# Altium PCB RS485_ProMini.PcbDoc
Units mil, origin at the board's own origin, x right, y up, seen from the top; angles counter-clockwise.
Board outline 6000 x 4000 mil, 2 copper layers (Top Layer, Bottom Layer); 6 components, 10 nets, 55 pads, 0 vias.
Unrouted connection lines stored in the file: 18.
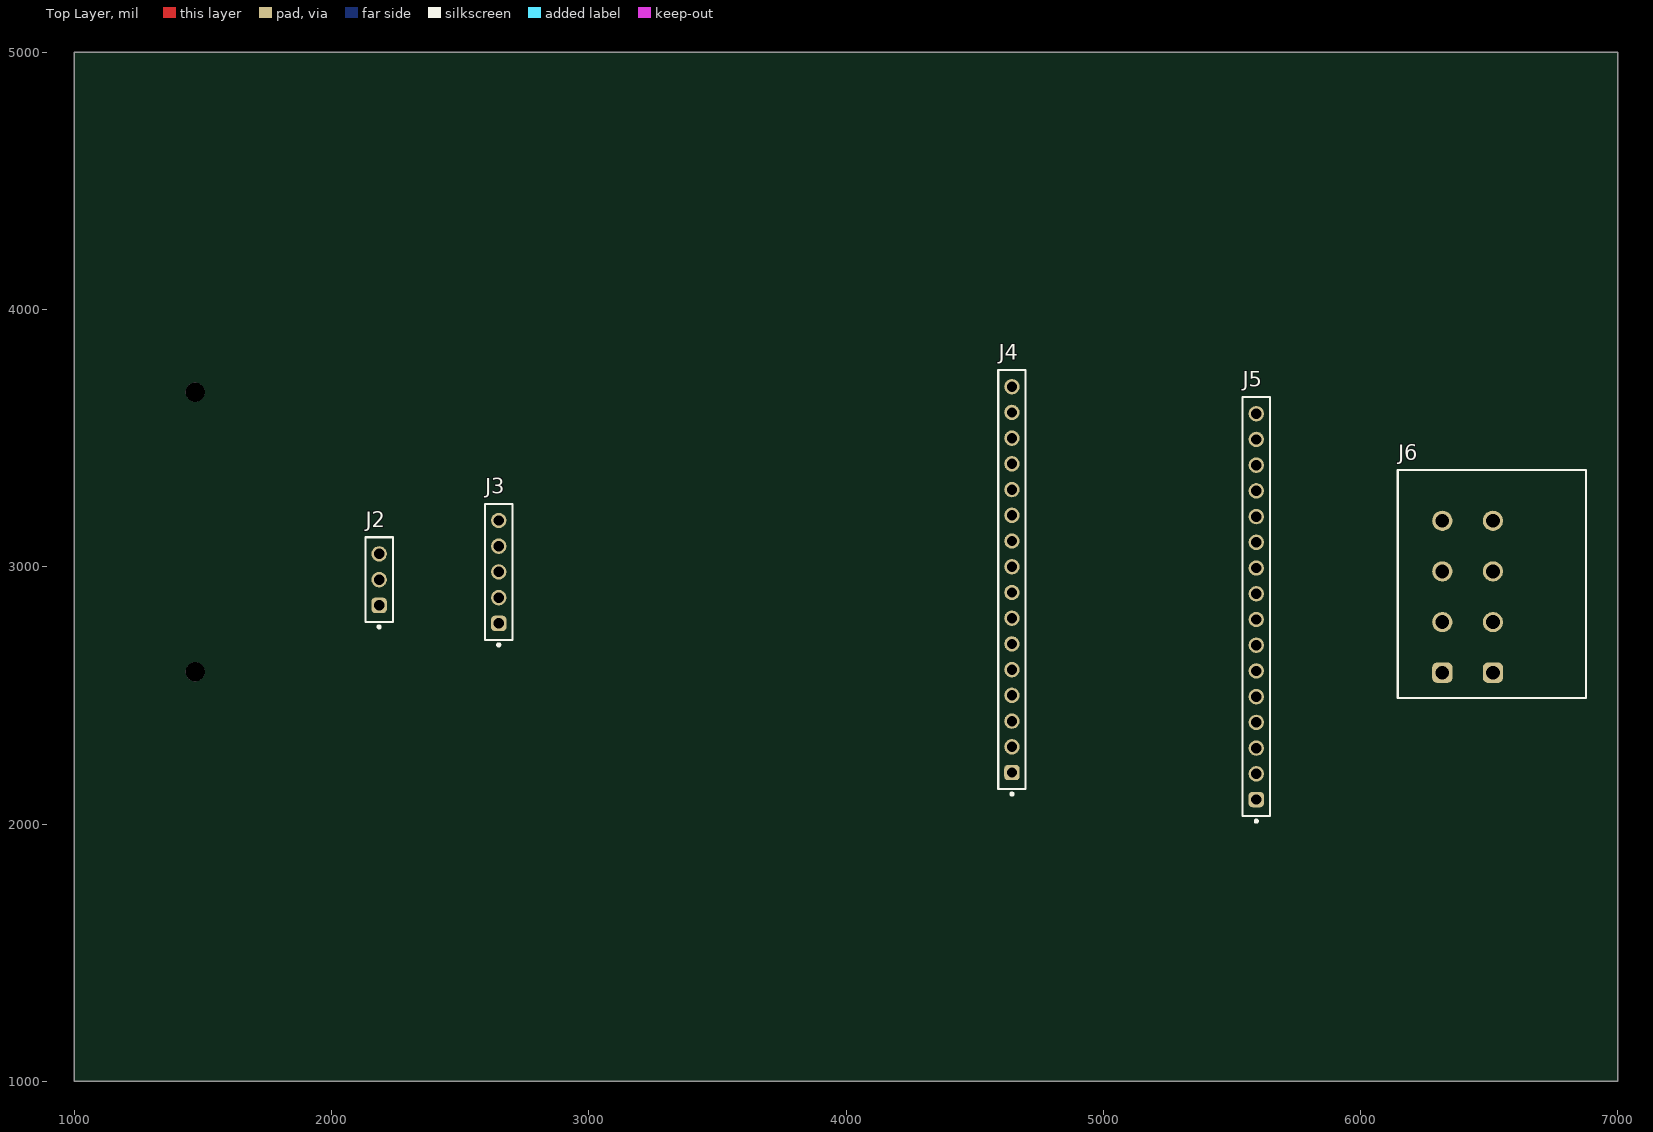
[diagram p0: Top Layer view]
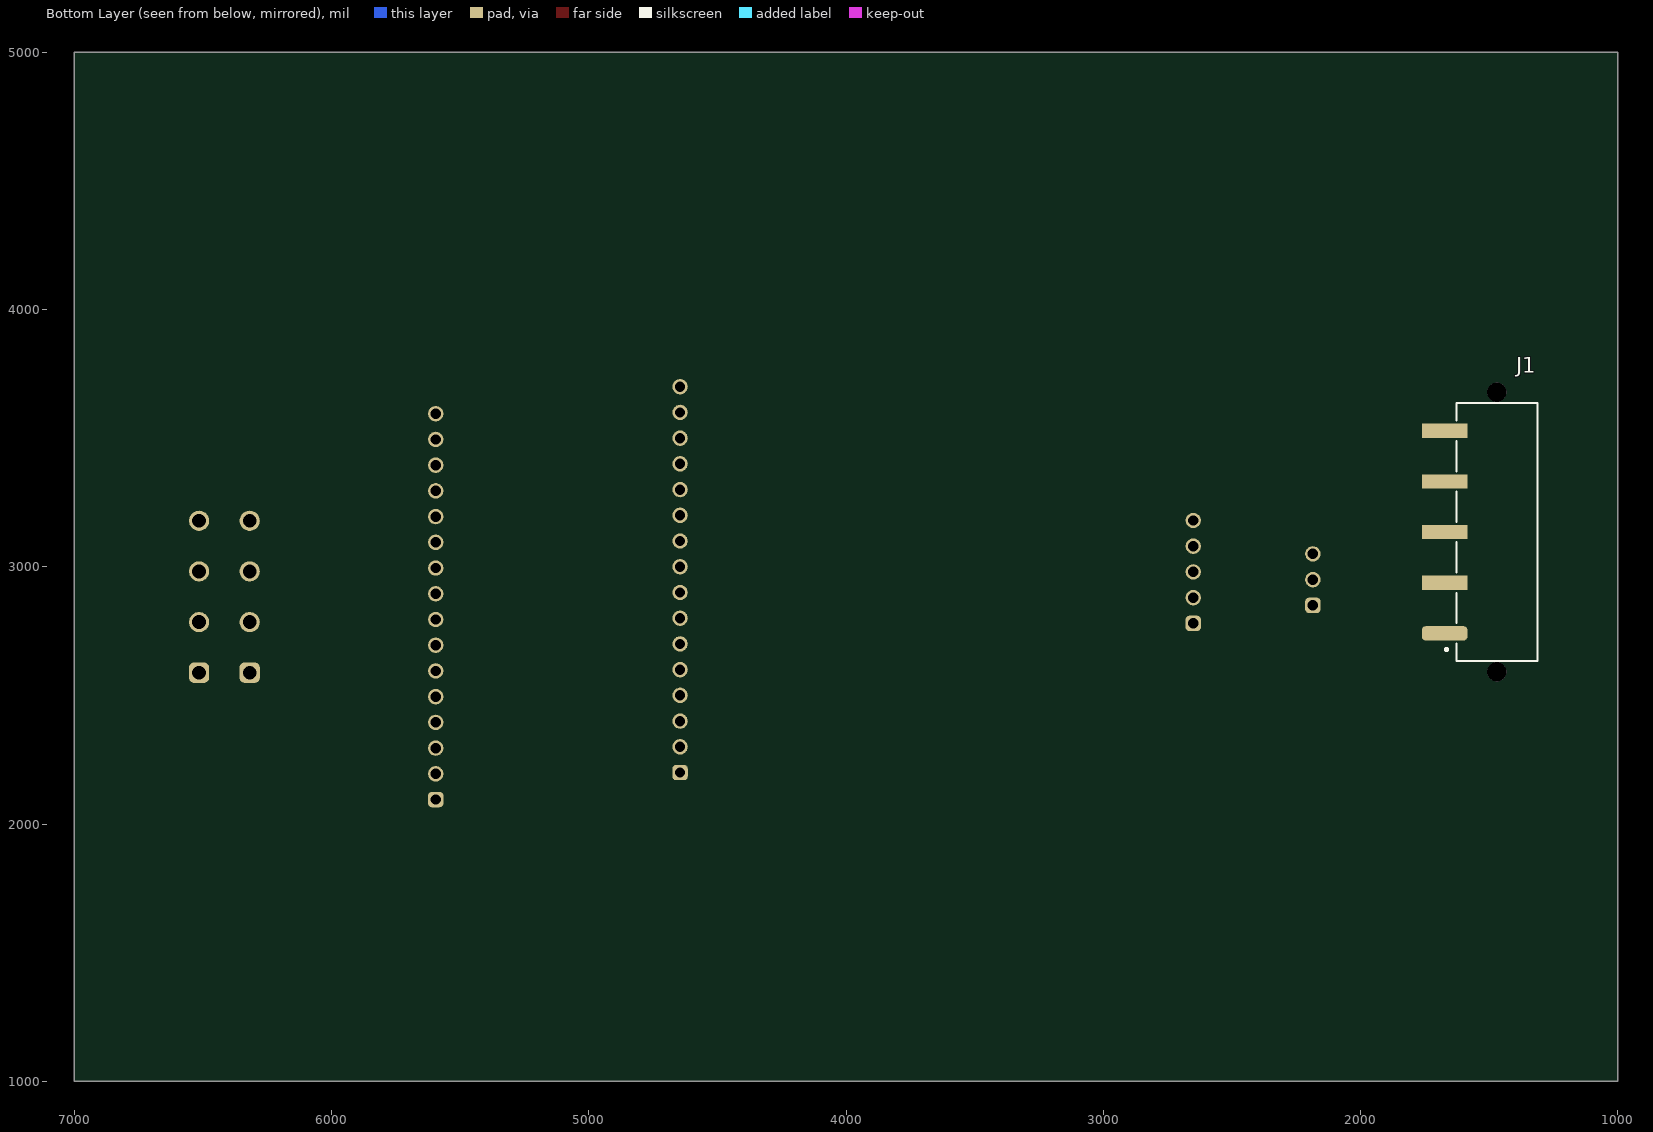
[diagram p1: Bottom Layer view, seen from below]

## Layer stack, top to bottom
Top Solder: solder mask 0.4, Solder Resist, Dk 3.5
Top Layer: signal copper 1.4
Dielectric 1: dielectric 12.6, FR-4, Dk 4.8
Bottom Layer: signal copper 1.4
Bottom Solder: solder mask 0.4, Solder Resist, Dk 3.5

## Board outline
1000,1000 7000,1000 7000,5000 1000,5000

## Design rules (kind name [scope] priority, off if disabled: settings)
Clearance [All] p1: gap=10 ignorepadtopadclearanceinfootprint=FALSE
PolygonConnect [All] p1: connectstyle=Relief reliefconductorwidth=10 reliefentries=4 polygonreliefangle="90 Angle" airgapwidth=10
RoutingVias [All] p1: holewidth=28 width=50 viastyle="Through Hole" minholewidth=28 minwidth=50 maxholewidth=28 maxwidth=50
SolderMaskExpansion [All] p1: expansion=0 istentingtop=FALSE
Width [All] p1: maxlimit=10 minlimit=10 preferedwidth=10
30 further rules are at their usual default settings.

## Classes and differential pairs
component class RS485_promini_connecter: J2 J3 J5 J6

## Components (designator, comment, footprint, x,y, rotation, side; value= is the part's Value field where it differs from the comment)
J1 "691709710305" 691709710305 1470,3135 r90 bottom
J2 "61300311821" 61300311821 2185,2950 r90 top
J3 "61300511821" 61300511821 2650,2980 r90 top
J4 "61301611821" 61301611821 4645,2950 r90 top
J5 "61301611821" 61301611821 5595,2845 r90 top
J6 "691127700004B" 691127700004B 6511.06,2932.64 r90 top

## Footprints (in the part's own frame and the unit in brackets; to place one, negate y for a bottom-side part, rotate by r counter-clockwise, add the part's x,y. Pads: shape width x height; smd on the part's side, far side on the other; paste and mask are expansions set on the pad)
61300311821 [mm] "Socket Header, Pitch 2.54 mm, THT, Vertical, single row, 3p"
  rrect50% 1.52x1.52 hole 1.02: 1(-2.54,0)
  round 1.52 hole 1.02: 2(0,0) 3(2.54,0)
  silkscreen extent -4.79,-1.35 4.19,1.35, body extent -4.06,-1.25 4.06,1.25, height 8.55
61300511821 [mm] "Socket Header, Pitch 2.54 mm, THT, Vertical, single row, 5p"
  rrect50% 1.52x1.52 hole 1.02: 1(-5.08,0)
  round 1.52 hole 1.02: 2(-2.54,0) 3(0,0) 4(2.54,0) 5(5.08,0)
  silkscreen extent -7.33,-1.35 6.73,1.35, body extent -6.6,-1.25 6.6,1.25, height 8.55
61301611821 [mm] "Socket Header, Pitch 2.54 mm, THT, Vertical, single row, 16p"
  rrect50% 1.52x1.52 hole 1.02: 1(-19.05,0)
  round 1.52 hole 1.02: 2(-16.51,0) 3(-13.97,0) 4(-11.43,0) 5(-8.89,0) 6(-6.35,0) 7(-3.81,0) 8(-1.27,0) 9(1.27,0) 10(3.81,0) 11(6.35,0) 12(8.89,0) 13(11.43,0) 14(13.97,0) 15(16.51,0) 16(19.05,0)
  silkscreen extent -21.3,-1.35 20.7,1.35, body extent -20.57,-1.25 20.57,1.25, height 8.55
691127700004B [mm] "5,00 mm - PCB Vertical - 04p"
  rrect50% 2x2 hole 1.35: 1(-8.75,-0.1) 1(-8.75,4.9)
  round 2 hole 1.35: 2(-3.75,-0.1) 2(-3.75,4.9) 3(1.25,4.9) 3(1.25,-0.1) 4(6.25,-0.1) 4(6.25,4.9)
  silkscreen extent -11.25,-9.3 11.25,9.3, body extent -11.25,-9.3 11.25,9.3, height 19.6
691709710305 [mm] "Horizontal Entry SMT with Pressure Clamp, pitch 5mm, 05p"
  rrect50% 1.4x4.5 smd: 1(-10,5.15)
  rect 1.4x4.5 smd: 2(-5,5.15) 3(0,5.15) 4(5,5.15) 5(10,5.15)
  round 1.9 hole 1.9 unplated: M1(-13.8,0) M2(13.8,0)
  silkscreen extent -12.75,-4 12.75,5.1, body extent -14.5,-4 14.5,7, height 9.95

## Part data
J1: library part CMP-1502-03338-3, "Terminal Block, 5.0MM, Rising Cage Clamp, Horizontal, SMT, 30-14 AWG, 5 Pins", Color=Black, Current=6A, Flammability Rating="UL94 V-0", Max Operating Temperature=130°C, Min Operating Temperature=-40°C, Voltage=300V, Connector Type=Screw, Contact Plating=Tin, Current Rating=6A, Housing Material=Nylon, Lead Pitch=5mm, Length=25mm, Mount="Surface Mount", Number of Contacts=5, Number of Levels=1, Number of Pins=5, Number of Positions=5, Number of Positions Per Level=5, Packaging="Cut Tape (CT)", Pitch=5mm, Plating=Steel, RoHS=Compliant, Termination=Screw, Voltage Rating=300V, Wire Gauge (Max)=30AWG, Wire Gauge (Min)=14AWG, Wire/Cable Gauge=30AWG
J2: library part CMP-1502-01315-4, "Btb Conn, Rcpt, 3Pos, 1Row, 2.54Mm Rohs Compliant: Yes", Contact Resistance=20mΩ, Current Rating=3A, Operating Supply Voltage=250V, Gender=Female, Lead Pitch=2.54mm, Number of Pins=3, Orientation=Vertical, RoHS=Non-Compliant
J3: library part CMP-1502-01320-4, "THT Vertical Socket Header WR-PHD, Pitch 2.54 mm, Single Row, 5 pins", Contact Resistance=20mΩ, Current Rating=3A, Operating Supply Voltage=250V, Gender=Female, Lead Pitch=2.54mm, Number of Pins=5, Orientation=Vertical
J4 J5: library part CMP-1502-01343-4, "THT Vertical Socket Header WR-PHD, Pitch 2.54 mm, Single Row, 16 pins", Contact Resistance=20mΩ, Current Rating=3A, Operating Supply Voltage=250V, Contact Material=Copper, Gender=Female, Lead Free="Lead Free", Lead Pitch=2.54mm, Number of Pins=16, Orientation=Vertical, RoHS=Compliant
J6: library part CMP-1502-03272-3, "Terminal Block, 5MM Pitch, Vertical, Pressure Clamp, 30 to 12 AWG, 4 Pins, Grn", Color=Green, Current=20A, Max Operating Temperature=105°C, Min Operating Temperature=-40°C, Voltage=300V, Connector Type="Terminal Block", Contact Material=Brass, Contact Plating=Tin, Height=19.5mm, Housing Material=Nylon, Lead Pitch=5mm, Length=18.6mm, Mount="Through Hole", Number of Contacts=4, Number of Levels=1, Number of Pins=4, Number of Positions Per Level=4, Packaging=Box, Pitch=5.0038mm, Plating=Steel, REACH SVHC=Unknown, RoHS=Compliant, Stripping Length=9mm, Termination=Screw, Width=22.5mm, Wire Gauge (Max)=30AWG, Wire Gauge (Min)=12AWG, Wire/Cable Gauge=30AWG

## Nets (pads, with @x,y where several pads share a name; then routed paths per layer and width w, separated by ;. In a path a pad name is that pad's centre, name@x,y a point inside that pad or via, vN(x,y) a via of type N, cw(c..) or ccw(c..) an arc to the next point about the centre after c; other vN are vias at no path point)
NetJ1_1: J1.1 J2.1
NetJ1_2: J1.2 J2.2
NetJ1_3: J1.3 J2.3
NetJ1_4: J1.4 J3.1 J4.2 J6.2
NetJ1_5: J1.5 J3.4 J4.4 J6.1
NetJ3_2: J3.2 J5.6
NetJ3_3: J3.3 J5.7
NetJ3_5: J3.5 J5.15
NetJ4_14: J4.14 J6.4
NetJ4_15: J4.15 J6.3
pads on no net: J1.M1 J1.M2 J4.1 J4.3 J4.5 J4.6 J4.7 J4.8 J4.9 J4.10 J4.11 J4.12 J4.13 J4.16 J5.1 J5.2 J5.3 J5.4 J5.5 J5.8 J5.9 J5.10 J5.11 J5.12 J5.13 J5.14 J5.16